# Altium PCB ESP32 with USBC.PcbDoc (part 2 of 3)
Units mil, origin at the board's own origin, x right, y up, seen from the top; angles counter-clockwise.
Board outline 2675 x 1175 mil, 4 copper layers (L1, L2, L3, L4), stack 61.583 mil thick; 64 components, 73 nets, 299 pads, 163 vias.
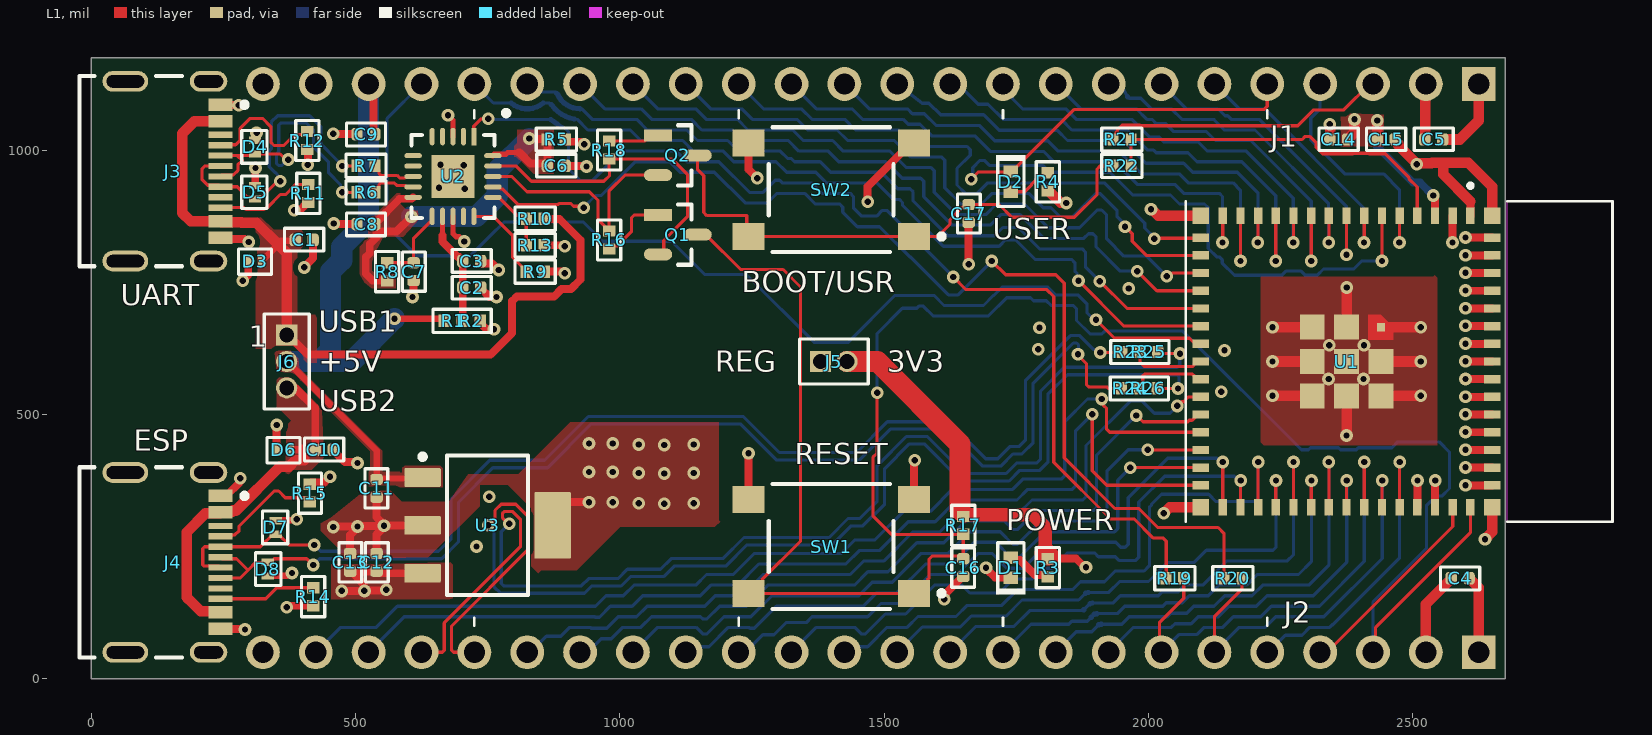
[diagram p0: L1 view]

## Via types
v1: diameter 24, hole 12, L1 to L4, tented both sides, 163 vias

## Nets (pads, with @x,y where several pads share a name; then routed paths per layer and width w, separated by ;. In a path a pad name is that pad's centre, name@x,y a point inside that pad or via, vN(x,y) a via of type N, cw(c..) or ccw(c..) an arc to the next point about the centre after c; other vN are vias at no path point)
+3V3: C4.1 C5.1 C14.2 C15.1 J1.2 J2.1 J5.2 R2.1 R3.2 R4.2 R5.1 R17.1 U1.3 | length 5065.6
  L1 w6: R5.1@897.01,1020 R5.1@898.01,1021
  L1 w15: R2.1@733.02,677 733.02,675.82 747.84,661 v1(762,661) ; R5.1@898.01,1021 898.01,1017.82 900.14,1015.69 925.88,1015.69 930.56,1011 v1(933,1011) ; R3.2@1810,227.01 1863.56,227.01 1879.56,211 v1(1882,211) ; v1(2539,914) 2542.36,910.64 U1.3@2542.36,875.59
  L1 w20: R4.2@1810,922.99 1811.18,922.99 1834.17,900 v1(1845,900) ; C14.2@2376.93,1020 2376.93,1021.18 2377.56,1021.81 2378.28,1021.81 2390,1033.53 v1(2390,1058) ; C15.1@2433.03,1020.03 v1(2433,1056) ; C5.1@2523.07,1020 2523.7,1020.63 2523.7,1123.7 J1.2@2525,1125 ; C4.1@2606.93,190 2606.93,188.82 2607.56,188.19 2608.74,188.19 2625,171.93 J2.1@2625,50
  L1 w25: R17.1@1650,307.01 1652.99,310 1781.57,310 1805,286.57 1805,238
  L1 w40: J5.2@1430,600 1487.4,600 1644,443.4 1644,319 ; 1805,238 1809.38,233.62 R3.2@1810,233.62
  L2 w30: 2456,1056 2502,1010 2523.33,1010 2637.04,896.29 2637.04,350.86 2600,313.82 2600,202.91 2625,177.91 J2.1@2625,50
  L2 w40: v1(762,661) 781,680 784.4,680 813,708.6 813,862.8 787.87,887.93 787.87,956.57 811.3,980 846.4,980 877.4,1011 v1(933,1011) 1134.2,1011 1285.2,860 1476,860 ; J5.2@1430,600 1476,646 1476,860 ; J1.2@2525,1125 2456,1056 v1(2433,1056) 2433,1040 2370.5,977.5 2015.1,977.5 1937.6,900 v1(1845,900) 1805,860 1476,860
  L4 w15: v1(2390,1058) v1@2391,1057 ; v1@2432,1057 v1(2433,1056) 2433,1006.28 2501.03,938.25 2514.46,938.25 2538.71,914 v1(2539,914)
"+3V3 _REG": C12.2 C13.2 J5.1 U3.3 | length 1322.6
  L1 w15: v1(474,166) v1(517,166) 518,167 557,167 v1(558,168) ; C13.2@490,203.07 C13.2@491.18,203.07 ; 515.28,178.97 C13.2@491.18,203.07 ; U3.3@626.97,199.45 544.8,199.45 541.18,203.07 C12.2@540,203.07 C13.2@491.18,203.07
  L2 w40: v1(558,168) 1035.4,168 1201.5,334.11 1201.5,443.89 1279.56,521.95 1301.95,521.95 J5.1@1380,600
+3V3_FTDI: C6.1 C8.1 R5.2 R8.1 U2.10 U2.20 | length 813
  L1 w10.01: U2.20@760,989.37 762.73,992.1 784.65,992.1 788.06,995.51 809,995.51
  L1 w15: C8.1@536.93,860 536.93,861.18 583.65,907.9 606.45,907.9 U2.10@609.17,910.63 ; R8.1@560,752.99 532.54,752.99 519.5,766.03 519.5,797.31 527.06,804.87 527.06,821.94 540.06,834.94 540.06,845.91 577.91,845.91 v1(606,874) ; 809,995.51 810.18,995.51 831.38,974.31 862.99,974.31 R5.2@862.99,1020 861.99,1021 830,1021 v1(829,1022)
  L4 w40: v1(606,874) 729,874 768.37,913.37 768.37,961.37 v1(829,1022)
+5V: C9.1 C11.2 J1.22 J6.2 R1.1 U3.1 | length 1379.4
  L1 w12: J6.2@370,600 370.91,600 540,430.91 C11.2@540,376.93 541.81,378.74 625.16,378.74 U3.1@626.97,380.55 ; v1(574,681) 663.99,681 R1.1@667.99,677
  L1 w15: J1.22@525,1125 533.8,1116.2 533.8,1033.13 C9.1@536.93,1030
  L4 w40: J6.2@370,600 431.5,600 ; J1.22@525,1125 525,867.6 474,816.6 474,791.4 452.75,770.15 452.75,621.25 431.5,600 ; v1(574,681) 493,600 431.5,600
+5V_VBUS1: C1.1 D3.2 J3.A4B9 J3.B4A9 J6.1 R10.2 | length 1527
  L1 w12: D3.2@322.8,790 322.8,794.92 323.69,795.81 328.61,795.81 347,814.2 347,816.58 352.8,822.39 358.61,828.19 C1.1@385.51,828.19
  L1 w15: J6.1@370,650 382.5,637.5 385.53,637.5 410.03,613 755.72,613 796.5,653.78 796.5,714.21 805.29,723 876,723 890,737 907.72,737 925.5,754.78 925.5,830.22 885.72,870 R10.2@857.01,870
  L1 w20: J3.A4B9@244.84,1054.49 195.49,1054.49 172,1031 172,881.72 188.2,865.51 J3.B4A9@244.84,865.51 246.65,863.7 283.82,863.7 285,862.52 312.67,862.52 352.8,822.39 353.99,821.2 370,805.19 J6.1@370,650 ; C1.1@385.51,828.19 386.14,828.82 C1.1@386.14,830
+5V_VBUS2: C10.1 D6.2 J4.A4B9 J4.B4A9 J6.3 | length 694.3
  L1 w15: J6.3@370,550 385.77,550 424,511.77 C10.1@424,433 400.4,433 D6.2@376.8,433
  L1 w20: J4.B4A9@244.84,125.51 243.03,127.32 207.33,127.32 191,143.65 181,153.65 181,277.28 216.39,312.68 243.03,312.68 J4.A4B9@244.84,314.49 246.65,316.3 266.96,316.3 268.83,318.17 274.11,318.17 357.12,401.19 374.2,401.19 385.92,412.9 403,412.9 403,430.4 400.4,433
+VCC_FTDI: C2.2 C3.1 R1.2 R2.2 U2.12 | length 210.2
  L1 w10.01: 664.58,838 664.58,847 664.9,847.33 U2.12@664.9,874.59
  L1 w15: 664.58,838 664.58,826.7 693.78,797.5 C3.1@696.75,797.5 ; R1.2@699.01,677 R1.2@702.14,680.13 ; R1.2@702.01,677 703.07,678.06 C2.2@703.07,740 C3.1@703.07,790
BTN_GPIO0: C17.1 Q2.3 R22.1 SW2.1 SW2.2 | length 1035.3
  L1 w6: Q2.3@1147.42,990 1147.42,962.86 1159,951.28 1159,881.86 1164.86,876 1240.14,876 1240.14,839.78 SW2.2@1243.5,836.42 SW2.1@1556.5,836.42 1601.42,836.42 1624.84,859.84 1624.84,868.27 1648.27,891.69 1654.76,891.69 C17.1@1660,896.93 1717.57,896.93 1741.5,873 1860,873 1903,916 1903,964.14 1908.86,970 R22.1@1932.99,970
CHIP_PU: C16.2 J2.3 Q1.3 R17.2 SW1.1 SW1.2 U1.45 | length 3972
  L1 w6: Q1.3@1147.42,840 1162.61,840 1228.61,774 1309,774 1342,741 1342,259.91 1269.02,186.93 1269.02,182.01 SW1.2@1248.43,161.42 ; SW1.2@1243.5,161.42 SW1.2@1248.43,161.42 ; v1(1487,541) 1487,426.61 1479,418.61 1479,308 1514.01,272.99 R17.2@1650,272.99 C16.2@1650,226.93 1644.93,232 1590.86,232 1585,226.14 1585,189.92 1582.01,186.93 1582.01,182.01 1561.42,161.42 SW1.1@1556.5,161.42 SW1.2@1248.43,161.42 ; J2.3@2425,50 2430,55 2430,97 2609.29,276.29 U1.45@2609.29,324.41
  L4 w6: v1(1487,541) 1487,653 1534.68,700.68 1561.96,700.68 1566,704.72 1574.28,704.72 1593,686 1697.28,686 1731.96,720.68 1777.04,720.68 1782.84,714.88 1807.12,714.88 1816,706 1858.3,706 1864.16,700.14 1864.16,677.66 1889.82,652 1912.18,652 1917.59,657.41 2065.38,657.41 2289.79,433 2303,433 2306.96,436.96 2359.82,436.96 2363.82,432.96 2393.32,432.96 2397.32,436.96 2460.96,436.96 2472,448 2550,448 2569.79,428.21 2569.79,386.19 2569.8,359.8 2555.41,345.41 2544.41,345.41 2526,327 2526,246.31 2425,145.31 J2.3@2425,50
CON1_USB_N: D4.2 J3.A7 J3.B7 R6.1 | length 550.6
  L1 w6.03: J3.A7@244.84,950.16 247.73,953.05 269.34,953.05 277.55,961.25 277.55,972.1 285.75,980.3 276.52,989.53 ; J3.B7@244.84,989.53 276.52,989.53 ; D4.2@310,993.2 307,990.2 307,989.53 276.52,989.53 ; D4.2@310.87,993.2 311.48,992.6 357.54,992.6 368.14,982 v1(373,982) ; v1(475,920) R6.1@502.99,920
  L4 w6.03: v1(373,982) 371.65,982 360.48,970.83 354.41,970.83 350.88,974.36 350.88,992.42 355,996.55 355,1047.47 358.53,1051 407.47,1051 420.95,1037.51 420.95,1005.2 449.19,976.97 449.19,957.01 471.75,934.45 471.75,923.25 v1(475,920)
CON1_USB_P: D5.2 J3.A6 J3.B6 R7.1 | length 573.3
  L1 w6.03: J3.A6@244.84,969.84 214.84,969.84 210,965 210,943.71 220.35,933.36 241.95,933.36 J3.B6@244.84,930.47 276.52,930.47 295.71,911.28 306.13,911.28 D5.2@310,907.41 313.87,911.28 322.56,911.28 v1@348.84,937.56 ; v1(475,970) R7.1@502.99,970
  L4 w6.03: v1(358,941) 358,945.86 352.56,951.3 352.56,953.27 349.03,956.8 348.6,956.8 336.85,968.55 336.85,998.24 340.97,1002.36 340.97,1053.28 352.72,1065.03 413.28,1065.03 434.99,1043.32 434.99,1011.01 463.22,982.78 463.22,982.52 475,970.74 v1(475,970)
CON2_USB_N: D7.2 J4.A7 J4.B7 R23.1 | length 2237.3
  L1 w6.03: J4.A7@244.84,210.16 241.95,213.05 213.48,213.05 211,215.53 211,246 214.53,249.53 J4.B7@244.84,249.53 320.2,249.53 344.08,273.41 D7.2@349,273.41 353.92,273.41 374.33,253 v1(422,253) ; v1(1909,617) 1948.98,617 R23.1@1949.98,618
  L4 w6.03: v1(422,253) 422.53,253 434.52,241.01 657.17,241.01 680.97,264.81 680.97,339.81 754.19,413.03 857.64,413.03 940.64,496.03 1233.97,496.03 1302.08,427.92 1448.08,427.92 1506.33,486.17 1622.48,486.17 1692.55,416.11 1715,416.11 1737.91,439.01 1754.92,439.01 1767.91,452 1767.91,564.51 1852.47,649.08 1870.09,649.08 1896.69,622.48 1898.66,622.48 1904.14,617 v1(1909,617)
CON2_USB_P: D8.2 J4.A6 J4.B6 R24.1 | length 2256.4
  L1 w6.03: J4.B6@244.84,190.47 282.01,190.47 296.77,205.24 ; J4.A6@244.84,229.84 247.73,226.95 275.06,226.95 296.77,205.24 ; D8.2@334,220 311.54,220 296.77,205.24 ; v1(1867,614) 1867,612.01 1883.02,595.99 1883.02,556.02 1887.02,552.02 1921.53,552.02 1924.55,549 R24.1@1948.98,549
  L1 w6.23: D8.2@334,220 338.92,220 346.01,227.09 374.63,227.09 374.84,226.89 407.47,226.89 419.35,215 v1(420,215)
  L4 w6.03: v1(420,215) 420.53,215 432.52,226.99 662.99,226.99 695,259 695,334 760,399 863.45,399 946.45,482 1228.16,482 1296.27,413.89 1453.89,413.89 1512.14,472.14 1616.67,472.14 1686.74,402.08 1720.81,402.08 1743.72,424.98 1760.73,424.98 1781.94,446.19 1781.94,558.7 1858.28,635.05 1864.28,635.05 1867.81,631.51 1867.81,614.81 v1(1867,614)
CON_ESP_USB_N: J2.21 R25.1 | length 2234.5
  L1 w6.03: J2.21@625,50 664.45,50 667.99,53.53 667.99,105.53 812.05,249.59 812.05,301.72 797.67,316.1 781.55,316.1 778.02,312.56 778.02,304.78 789.8,293 v1(791,293) ; R25.1@2018.02,618 2021.02,615 v1(2060,615)
  L4 w6.03: v1(791,293) 776,278 776,180 780.5,175.5 927.5,175.5 941.25,189.25 996.76,189.25 1014.56,207.05 1077.2,207.05 1097.2,227.05 1195.05,227.05 1235.05,267.05 1396,267.05 1431.9,302.94 1454.1,302.94 1486.97,335.81 1486.97,402.81 1542.27,458.11 1581.89,458.11 1651.96,388.05 1730.85,388.05 1750.85,408.05 1789.02,408.05 1795.97,415 1795.97,543.8 1841.19,589.02 2054.47,589.02 2059.41,593.96 2059.41,614.41 v1(2060,615)
CON_ESP_USB_P: J2.20 R26.1 | length 2298.3
  L1 w6.03: J2.20@725,50 685.55,50 682.02,53.53 682.02,99.72 826.08,243.78 826.08,307.53 803.48,330.13 775.74,330.13 763.99,318.37 763.99,301.78 752.2,290 v1(751,290) ; R26.1@2017.02,549 v1(2056,549)
  L4 w6.03: v1(751,290) 761.97,279.03 761.97,174.19 774.69,161.47 933.31,161.47 947.06,175.22 1002.57,175.22 1020.37,193.02 1083.02,193.02 1103.02,213.02 1200.86,213.02 1240.86,253.02 1401.81,253.02 1437.71,288.91 1459.91,288.91 1501,330 1501,397 1548.08,444.08 1576.08,444.08 1646.14,374.02 1736.66,374.02 1756.66,394.02 1794.83,394.02 1810,409.19 1810,537.99 1847,574.99 2054.47,574.99 2058,571.45 2058,551 v1(2056,549)
CON_GPIO0: J1.3 R21.1 | length 541.8
  L1 w6: R21.1@1932.99,1020 1938.62,1025.63 1938.62,1032.67 1941.38,1035.42 1941.38,1038.02 1950.16,1046.81 1983.85,1046.81 1984.66,1046 2283,1046 2313,1076 2369.82,1076 2418.82,1125 J1.3@2425,1125
DTR_FTDI: Q2.2 R16.2 U2.18 | length 465.4
  L1 w6: U2.18@760,950 795.59,950 824.59,921 942.59,921 959,904.59 959,868.01 973.19,853.82 973.19,852.64 978.82,847.01 R16.2@980,847.01 980,922.72 1009.88,952.6 Q2.2@1072.58,952.6
ESP_USB_N: R23.2 R25.2 U1.23 | length 142.7
  L1 w6.03: R23.2@1984,618 1984,599.28 1993,590.28 2083.18,590.28 2086.72,593.82 2086.72,595.14 2091.57,600 U1.23@2099.45,600
ESP_USB_P: R24.2 R26.2 U1.24 | length 142.6
  L1 w6.03: R26.2@1983,549 1989.47,555.47 1989.47,572.72 1993,576.25 2083.18,576.25 2086.72,572.72 2086.72,571.39 2091.57,566.54 U1.24@2099.45,566.54
FTDI_RESET: C7.1 R8.2 U2.11 | length 152.3
  L1 w6: R8.2@560,787.01 R8.2@560,787.01 609.96,786.97 C7.1@610,786.93 610,833.07 645.22,868.28 U2.11@645.22,874.59
FTDI_USB_N: R6.2 U2.9 | length 86.8
  L1 w6.03: R6.2@537.01,920 544.62,927.61 544.62,934.45 548.16,937.99 572.95,937.99 577.79,933.14 593.64,933.14 596.47,930.32 U2.9@609.17,930.32
FTDI_USB_P: R7.2 U2.8 | length 86.8
  L1 w6.03: R7.2@537.01,970 544.62,962.39 544.62,955.55 548.16,952.01 578.76,952.01 583.6,947.17 593.64,947.17 596.47,950 U2.8@609.17,950